# EAGLE board Kitty_PCB (EAGLE 9.2.2)
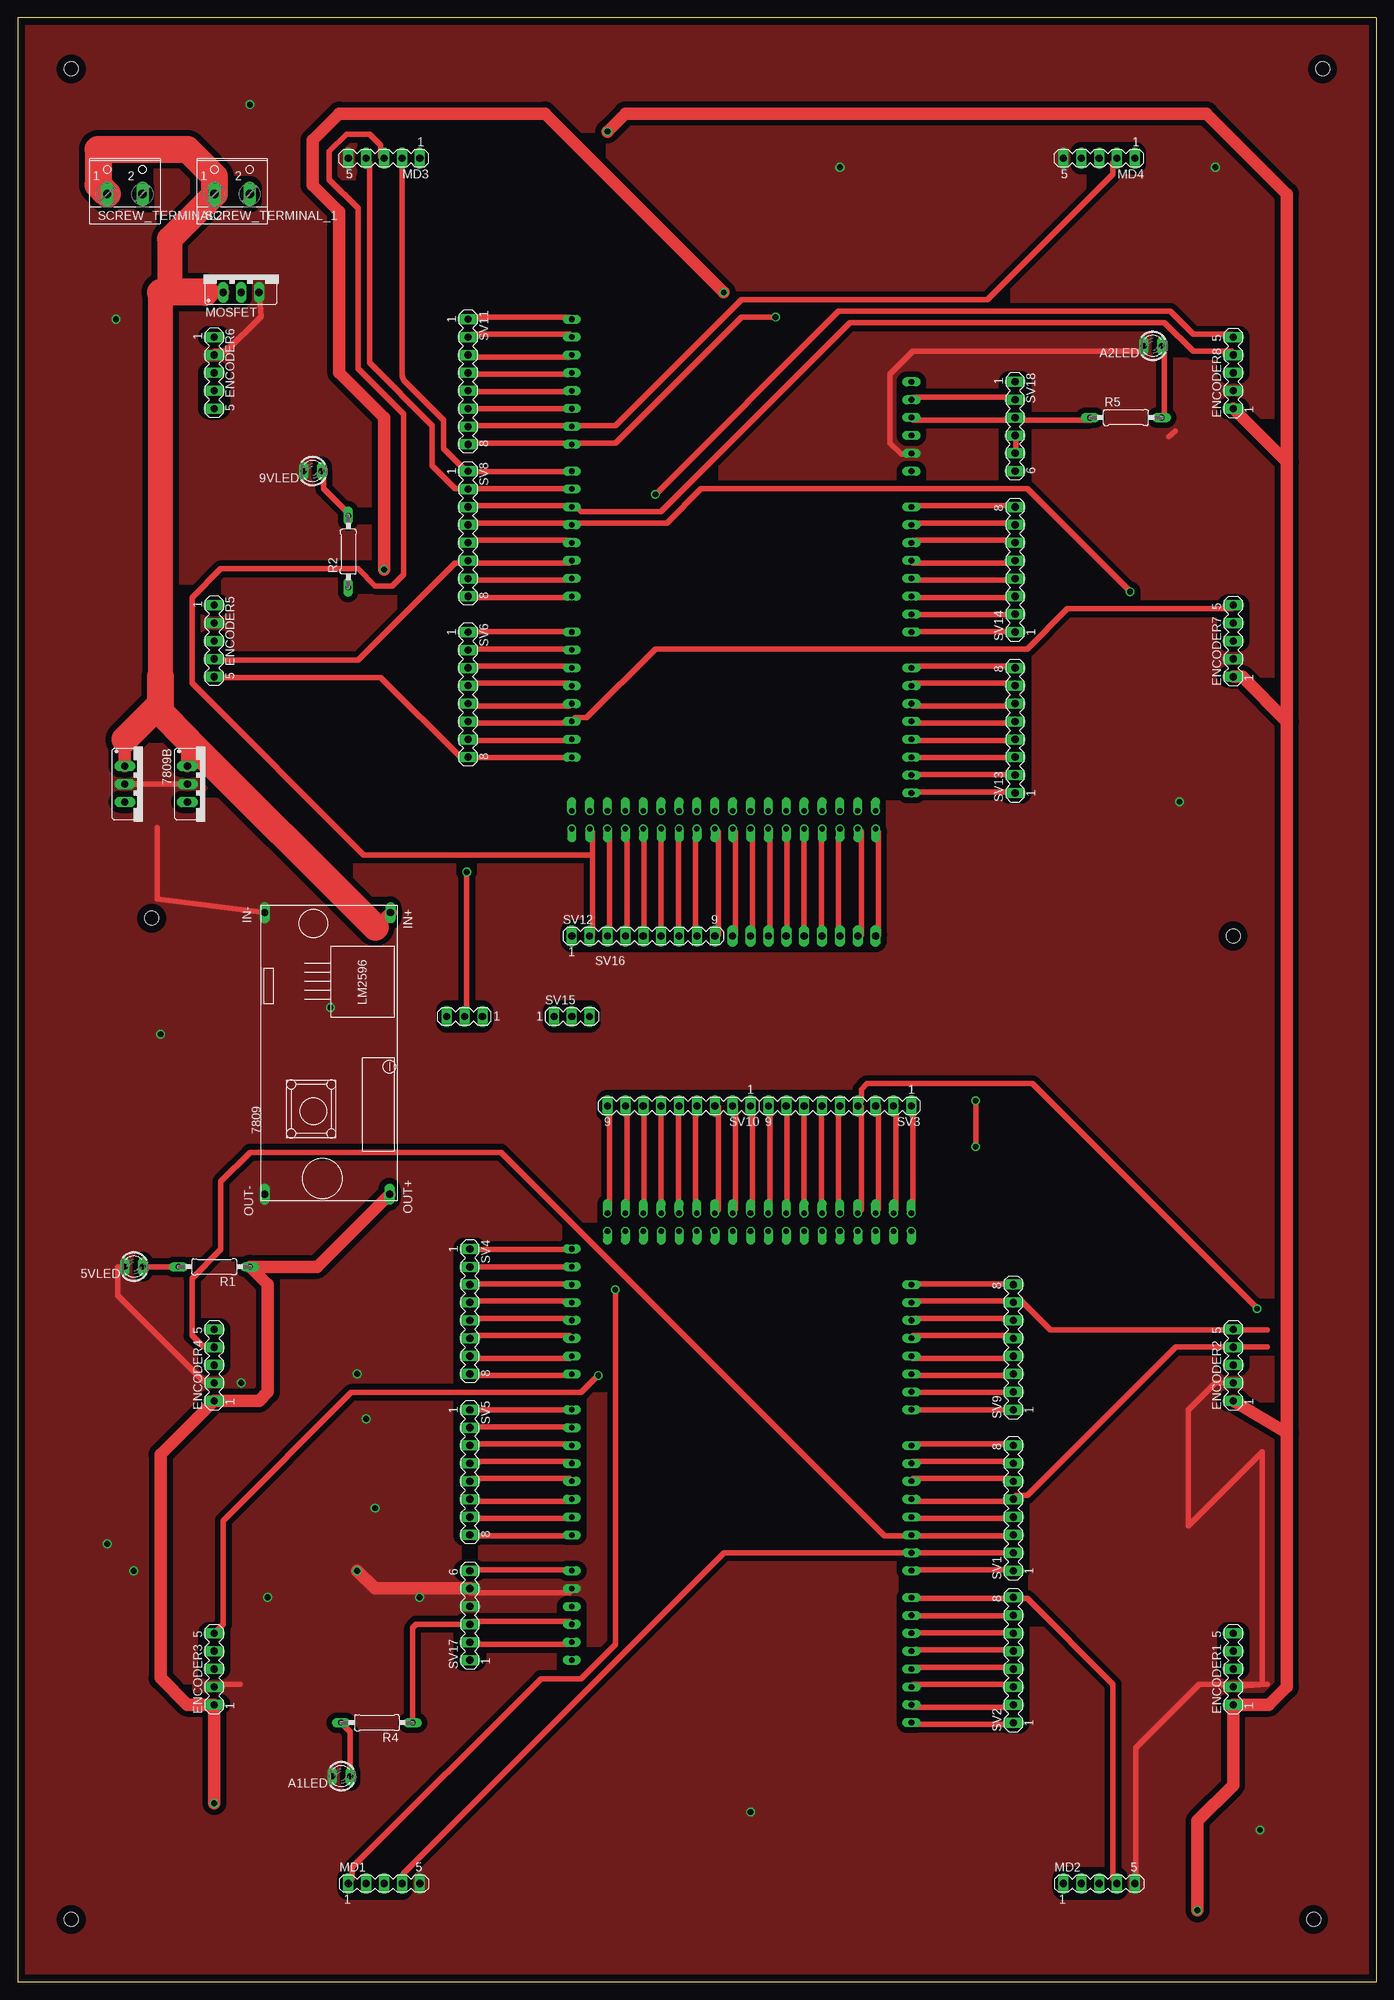
[diagram p0: board, top side]
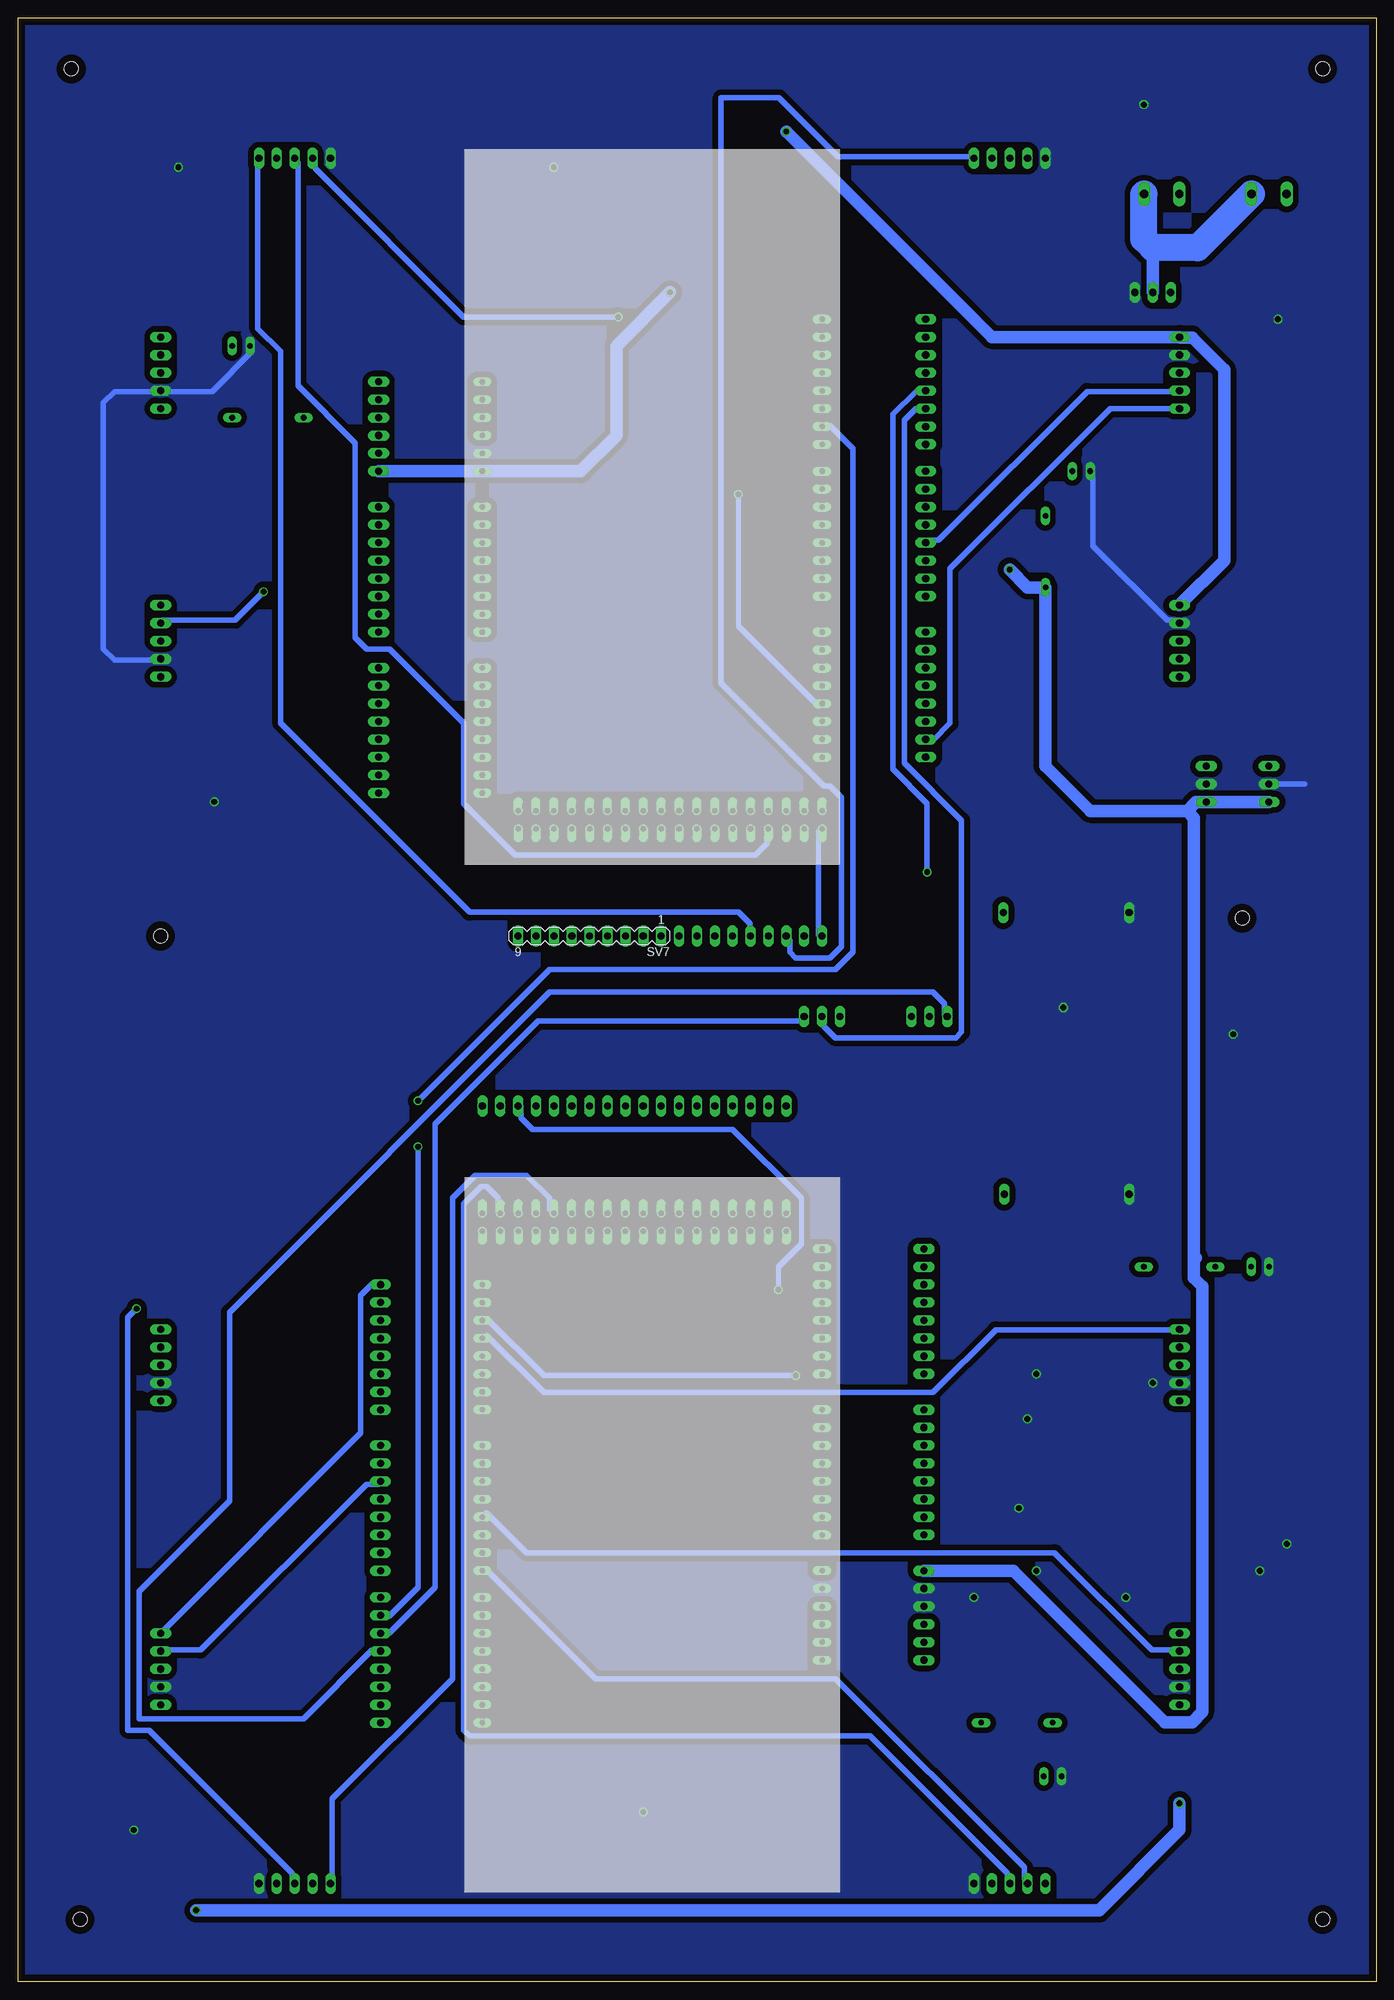
[diagram p1: board, bottom side, seen from below]

Size 193.04 x 279.07 mm. Coordinates in mm from the lower left corner, seen from the top.
Outline: 0,0 193.04,0 193.04,279.07 0,279.07 0,0
Copper layers (1*16): Top 0.035mm / dielectric 1.5mm / Bottom 0.035mm
Design rules "default *": minimum track width 10mil, minimum drill 24mil, track to track 16mil, track to pad 16mil, pad to pad 16mil, via to via 16mil, smd to smd 8mil, copper to edge 40mil, drill to drill 8mil, minimum pad ring 10mil, minimum via ring 8mil, stop-mask expansion 4mil, vias tented up to drill 0mil, thermal gap 10mil
Net classes: 0 default: width 0.813 mm, drill 0.813 mm, clearance 0.813 mm
Holes 2.03 mm at 184.15,8.89 7.62,8.89 7.62,271.78 19.05,151.13 172.72,148.59 185.42,271.78

## Footprints (pad centres in the part's own frame; a part is rotated, then mirrored left to right if it is on the bottom)
LED3MM = drill 0.813 long: A -1.27,0; K 1.27,0
78XXS = drill 1.016 long: GND 0,-2.54; IN -2.54,-2.54; OUT 2.54,-2.54
MEGABOX = drill 0.8 long: 0 12.7,24.13; 1 10.16,24.13; 2 7.62,24.13; 3 5.08,24.13; 3V3 -15.24,-24.13; 4 2.54,24.13; 5 0,24.13; 5V -12.7,-24.13; 6 -2.54,24.13; 7 -5.08,24.13; 8 -8.89,24.13; 9 -11.43,24.13; 10 -13.97,24.13; 11 -16.51,24.13; 12 -19.05,24.13; 13 -21.59,24.13; 14 17.78,24.13; 15 20.32,24.13; 16 22.86,24.13; 17 25.4,24.13; 18 27.94,24.13; 19 30.48,24.13; 20 33.02,24.13; 21 35.56,24.13; A0 0,-24.13; A1 2.54,-24.13; A2 5.08,-24.13; A3 7.62,-24.13; A4 10.16,-24.13; A5 12.7,-24.13; A6 15.24,-24.13; A7 17.78,-24.13; A8 22.86,-24.13; A9 25.4,-24.13; A10 27.94,-24.13; A11 30.48,-24.13; A12 33.02,-24.13; A13 35.56,-24.13; A14 38.1,-24.13; A15 40.64,-24.13; AREF -26.67,24.13; GND@1 -24.13,24.13; GND@2 -10.16,-24.13; GND@3 -7.62,-24.13; RESET -17.78,-24.13; VIN -5.08,-24.13 | drill 0.8 offset: 22 43.18,21.59; 23 45.72,21.59; 24 43.18,19.05; 25 45.72,19.05; 26 43.18,16.51; 27 45.72,16.51; 28 43.18,13.97; 29 45.72,13.97; 30 43.18,11.43; 31 45.72,11.43; 32 43.18,8.89; 33 45.72,8.89; 34 43.18,6.35; 35 45.72,6.35; 36 43.18,3.81; 37 45.72,3.81; 38 43.18,1.27; 39 45.72,1.27; 40 43.18,-1.27; 41 45.72,-1.27; 42 43.18,-3.81; 43 45.72,-3.81; 44 43.18,-6.35; 45 45.72,-6.35; 46 43.18,-8.89; 47 45.72,-8.89; 48 43.18,-11.43; 49 45.72,-11.43; 50 43.18,-13.97; 51 45.72,-13.97; 52 43.18,-16.51; 53 45.72,-16.51; GND@4 43.18,24.13; GND@5 45.72,24.13; GND@6 43.18,-19.05; GND@7 45.72,-19.05
MA05-1 = drill 1.016 long: 1 -5.08,0; 2 -2.54,0; 3 0,0; 4 2.54,0; 5 5.08,0
0207/10 = drill 0.813 long: 1 -5.08,0; 2 5.08,0
POWER_CONNECTOR = drill 1.194 long: 1 -2.5,-1.27; 2 2.5,-1.27
MA08-1 = drill 1.016 long: 1 -8.89,0; 2 -6.35,0; 3 -3.81,0; 4 -1.27,0; 5 1.27,0; 6 3.81,0; 7 6.35,0; 8 8.89,0
MA09-1 = drill 1.016 long: 1 -10.16,0; 2 -7.62,0; 3 -5.08,0; 4 -2.54,0; 5 0,0; 6 2.54,0; 7 5.08,0; 8 7.62,0; 9 10.16,0
MA03-1 = drill 1.016 long: 1 -2.54,0; 2 0,0; 3 2.54,0
MA06-1 = drill 1.016 long: 1 -6.35,0; 2 -3.81,0; 3 -1.27,0; 4 1.27,0; 5 3.81,0; 6 6.35,0
BUCK_CONVERTER = drill 1.016 long: IN+ -18.558,7.255; IN- -18.558,-10.618; OUT+ 21.442,7.128; OUT- 21.442,-10.618

## Placement (x,y rotation side)
5VLED  LED  [LED3MM]  16.51,101.6 180 top
9VLED  LED  [LED3MM]  41.91,214.63 180 top
7809  [78XXS]  17.78,170.18 270 top
7809B  [78XXS]  26.67,170.18 270 top
A1LED  LED  [LED3MM]  45.97,29.21 180 top
A2LED  LED  [LED3MM]  161.29,232.41 180 top
ARDUINO1  MEGA_DEVICE  [MEGABOX]  102.87,63.5 90 bottom
ARDUINO2  MEGA_DEVICE  [MEGABOX]  102.87,209.55 270 bottom
ENCODER1  [MA05-1]  172.72,44.45 90 top
ENCODER2  [MA05-1]  172.72,87.63 90 top
ENCODER3  [MA05-1]  27.94,44.45 90 top
ENCODER4  [MA05-1]  27.94,87.63 90 top
ENCODER5  [MA05-1]  27.94,190.5 270 top
ENCODER6  [MA05-1]  27.94,228.6 270 top
ENCODER7  [MA05-1]  172.72,190.5 90 top
ENCODER8  [MA05-1]  172.72,228.6 90 top
MD1  [MA05-1]  52.07,13.97 0 top
MD2  [MA05-1]  153.67,13.97 0 top
MD3  [MA05-1]  52.07,259.08 180 top
MD4  [MA05-1]  153.67,259.08 180 top
MOSFET  [78XXS]  31.75,242.57 0 top
R1  [0207/10]  27.94,101.6 180 top
R2  [0207/10]  46.99,203.2 90 top
R4  [0207/10]  51.05,36.83 180 top
R5  [0207/10]  157.48,222.25 0 top
SCREW_TERMINAL2  [POWER_CONNECTOR]  15.24,255.27 0 top
SCREW_TERMINAL_1  [POWER_CONNECTOR]  30.48,255.27 0 top
SV1  [MA08-1]  141.48,67.31 90 top
SV2  [MA08-1]  141.48,45.72 90 top
SV3  [MA09-1]  116.84,124.46 180 top
SV4  [MA08-1]  64.26,95.25 270 top
SV5  [MA08-1]  64.26,72.39 270 top
SV6  [MA08-1]  64.01,182.88 270 top
SV7  [MA09-1]  111.76,148.59 180 bottom
SV8  [MA08-1]  64.01,205.74 270 top
SV9  [MA08-1]  141.48,90.17 90 top
SV10  [MA09-1]  93.98,124.46 180 top
SV11  [MA08-1]  64.01,227.33 270 top
SV12  [MA09-1]  88.9,148.59 0 top
SV13  [MA08-1]  141.73,177.8 90 top
SV14  [MA08-1]  141.73,200.66 90 top
SV15  [MA03-1]  78.74,137.16 0 top
SV16  [MA03-1]  63.5,137.16 180 top
SV17  [MA06-1]  64.26,52.07 90 top
SV18  [MA06-1]  141.73,220.98 270 top
U$1  [BUCK_CONVERTER]  45.72,133.35 270 top

## Library data of the parts
5VLED 9VLED A1LED A2LED = robocon; MF: VISHAY SEMICONDUCTOR; OC_FARNELL: 1612437
7809 7809B MOSFET R1 R2 R4 R5 U$1 = robocon
ARDUINO1 ARDUINO2 = ArduinoMegaSymbol
ENCODER1-ENCODER8 MD1-MD4 SV1-SV18 = robocon; OC_FARNELL: unknown; OC_NEWARK: unknown
SCREW_TERMINAL2 SCREW_TERMINAL_1 = robocon; MPN: 237-102; OC_FARNELL: unknown; OC_NEWARK: 70K9898

## Nets
0A1: ARDUINO1.0 SV1.8
0A2: ARDUINO2.0 SV8.8
1A1: ARDUINO1.1 SV1.7
1A2: ARDUINO2.1 SV8.7
2A1: ARDUINO1.2 ENCODER1.4 SV1.6
2A2: ARDUINO2.2 ENCODER5.4 SV8.6
3A1: ARDUINO1.3 ENCODER2.4 SV1.5
3A2: ARDUINO2.3 ENCODER6.4 SV8.5
4A1: ARDUINO1.4 ENCODER3.4 SV1.4
4A2: ARDUINO2.4 ENCODER7.4 SV8.4
5A1: ARDUINO1.5 ENCODER4.4 SV1.3
5A2: ARDUINO2.5 ENCODER8.4 SV8.3
5V: ENCODER1.1 ENCODER2.1 ENCODER3.1 ENCODER4.1 ENCODER5.1 ENCODER6.1 ENCODER7.1 ENCODER8.1 R1.1 U$1.OUT+
6A1: ARDUINO1.6 MD1.4 SV1.2
6A2: ARDUINO2.6 MD3.4 SV8.2
7A1: ARDUINO1.7 MD1.2 SV1.1
7A2: ARDUINO2.7 MD3.2 SV8.1
8A1: ARDUINO1.8 MD2.4 SV2.8
8A2: ARDUINO2.8 MD4.4 SV11.8
9A1: MD2.2
9A2: ARDUINO1.9 ARDUINO2.9 MD4.2 SV2.7 SV11.7
9V: 7809.OUT 7809B.OUT ARDUINO1.VIN ARDUINO2.VIN R2.1 SV17.6 SV18.6
12A1: ARDUINO1.12 SV2.4
12A2: ARDUINO2.12 SV11.4
12V_IN_GND: MOSFET.GND SCREW_TERMINAL2.2 SCREW_TERMINAL_1.2
12V_OUT: 7809.IN 7809B.IN MOSFET.IN SCREW_TERMINAL2.1 SCREW_TERMINAL_1.1 U$1.IN+
13A1: ARDUINO1.13 SV2.3
13A2: ARDUINO2.13 SV11.3
14A1: ARDUINO1.14 SV9.1
14A2: ARDUINO2.14 SV6.1
15A1: ARDUINO1.15 SV9.2
15A2: ARDUINO2.15 SV6.2
16A1: ARDUINO1.16 SV9.3
16A2: ARDUINO2.16 SV6.3
17A1: ARDUINO1.17 SV9.4
17A2: ARDUINO2.17 SV6.4
18A1: ARDUINO1.18 ENCODER4.5 SV9.5
18A2: ARDUINO2.18 ENCODER8.5 SV6.5
19A1: ARDUINO1.19 ENCODER3.5 SV9.6
19A2: ARDUINO2.19 ENCODER7.5 SV6.6
20A1: ARDUINO1.20 ENCODER2.5 SV9.7
20A2: ARDUINO2.20 ENCODER6.5 SV6.7
21A1: ARDUINO1.21 ENCODER1.5 SV9.8
21A2: ARDUINO2.21 ENCODER5.5 SV6.8
23A1: ARDUINO1.23 MD1.3 SV3.2
23A2: ARDUINO2.23 MD3.3 SV12.2
25A1: ARDUINO1.25 MD1.1 SV3.3
25A2: ARDUINO2.25 MD3.1 SV12.3
27A1: ARDUINO1.27 MD2.3 SV3.4
27A2: ARDUINO2.27 MD4.3 SV12.4
29A1: ARDUINO1.29 MD2.1 SV3.5
29A2: ARDUINO2.29 MD4.1 SV12.5
31A1: ARDUINO1.31 SV3.6
31A2: ARDUINO2.31 SV12.6
33A1: ARDUINO1.33 SV3.7
33A2: ARDUINO2.33 SV12.7
35A1: ARDUINO1.35 SV3.8
35A2: ARDUINO2.35 SV12.8
37A1: ARDUINO1.37 SV3.9
37A2: ARDUINO2.37 SV12.9
A1SC1: ARDUINO1.10 SV2.6 SV15.3
A1SC2: ARDUINO1.11 SV2.5 SV16.3
A2SC1: ARDUINO2.10 SV11.6 SV15.2
A2SC2: ARDUINO2.11 SV11.5 SV16.2
GND: 5VLED.K 9VLED.K 7809.GND 7809B.GND A1LED.K A2LED.K ARDUINO1.GND@3 ARDUINO2.GND@3 ENCODER1.2 ENCODER2.2 ENCODER3.2 ENCODER4.2 ENCODER5.2 ENCODER6.2 ENCODER7.2 ENCODER8.2 MD1.5 MD2.5 MD3.5 MD4.5 MOSFET.OUT SV17.4 SV17.5 U$1.IN- U$1.OUT-
N$1: ARDUINO1.3V3 SV17.2
N$2: ARDUINO1.5V R4.1 SV17.3
N$3: 5VLED.A R1.2
N$4: SV18.4 SV18.5
N$5: ARDUINO2.3V3 SV18.2
N$6: ARDUINO2.5V R5.1 SV18.3
N$7: A1LED.A R4.2
N$8: A2LED.A R5.2
N$19: 9VLED.A R2.2
N$20: ARDUINO1.GND@5 SV3.1
N$24: ARDUINO1.GND@1 SV2.2
N$25: ARDUINO1.AREF SV2.1
N$26: ARDUINO1.A15 SV4.1
N$27: ARDUINO1.A14 SV4.2
N$28: ARDUINO1.A13 SV4.3
N$29: ARDUINO1.A12 SV4.4
N$30: ARDUINO1.A11 SV4.5
N$31: ARDUINO1.A10 SV4.6
N$32: ARDUINO1.A9 SV4.7
N$33: ARDUINO1.A8 SV4.8
N$34: ARDUINO1.A7 SV5.1
N$35: ARDUINO1.A6 SV5.2
N$36: ARDUINO1.A5 SV5.3
N$37: ARDUINO1.A4 SV5.4
N$38: ARDUINO1.A3 SV5.5
N$39: ARDUINO1.A2 SV5.6
N$40: ARDUINO1.A1 SV5.7
N$41: ARDUINO1.A0 SV5.8
N$59: SV15.1
N$64: ARDUINO2.GND@1 SV11.2
N$65: ARDUINO2.AREF SV11.1
N$66: ARDUINO2.A15 SV13.1
N$67: ARDUINO2.A14 SV13.2
N$68: ARDUINO2.A13 SV13.3
N$69: ARDUINO2.A12 SV13.4
N$70: ARDUINO2.A11 SV13.5
N$71: ARDUINO2.A10 SV13.6
N$72: ARDUINO2.A9 SV13.7
N$73: ARDUINO2.A8 SV13.8
N$74: ARDUINO2.A7 SV14.1
N$75: ARDUINO2.A6 SV14.2
N$76: ARDUINO2.A5 SV14.3
N$77: ARDUINO2.A4 SV14.4
N$78: ARDUINO2.A3 SV14.5
N$79: ARDUINO2.A2 SV14.6
N$80: ARDUINO2.A1 SV14.7
N$81: ARDUINO2.A0 SV14.8
N$82: SV16.1
N$88: ARDUINO1.39 SV10.1
N$89: ARDUINO1.41 SV10.2
N$90: ARDUINO1.43 SV10.3
N$91: ARDUINO1.45 SV10.4
N$92: ARDUINO1.47 SV10.5
N$93: ARDUINO1.49 SV10.6
N$94: ARDUINO1.51 SV10.7
N$95: ARDUINO1.53 SV10.8
N$96: ARDUINO1.GND@7 SV10.9
N$97: ARDUINO2.GND@5 SV12.1
N$106: ARDUINO2.39 SV7.1
N$107: ARDUINO2.41 SV7.2
N$108: ARDUINO2.43 SV7.3
N$109: ARDUINO2.45 SV7.4
N$110: ARDUINO2.47 SV7.5
N$111: ARDUINO2.49 SV7.6
N$112: ARDUINO2.51 SV7.7
N$113: ARDUINO2.53 SV7.8
N$114: ARDUINO2.GND@7 SV7.9
N$118: ENCODER1.3
N$122: ENCODER2.3
N$126: ENCODER4.3
N$130: ENCODER3.3

## Tracks (layer width: path | path; a pad name or v marks a point on that pad's centre or on a via)
0A1
  Top 0.813: ARDUINO1.0 127.2,76.4 141.02,76.4 SV1.8
0A2
  Top 0.813: ARDUINO2.0 78.44,196.7 64.62,196.7 SV8.8
1A1
  Top 0.813: ARDUINO1.1 127.2,73.97 141.02,73.97 SV1.7
1A2
  Top 0.813: ARDUINO2.1 78.44,199.14 64.62,199.14 SV8.7
2A1
  Top 0.813: ARDUINO1.2 127.2,71.53 141.02,71.53 SV1.6
  Bottom 0.813: ENCODER1.4 172.57,47.14 172.52,47.14 167.03,47.14 143.46,70.71 141.83,70.71 SV1.6
2A2
  Top 0.813: ARDUINO2.2 78.44,201.57 64.62,201.57 SV8.6 63.81,201.57 62.18,201.57 48.36,187.76 28.04,187.76 ENCODER5.4
3A1
  Top 0.813: ARDUINO1.3 127.2,68.28 141.02,68.28 SV1.5 141.83,69.09 143.46,69.09 164.59,90.22 177.6,90.22 ENCODER2.4
3A2
  Top 0.813: ARDUINO2.3 78.44,204.83 64.62,204.83 SV8.5
  Bottom 0.813: ENCODER6.4 28.04,225.96 41.05,225.96 62.18,204.83 63.81,204.83 SV8.5
4A1
  Top 0.813: ARDUINO1.4 127.2,65.84 141.02,65.84 SV1.4
  Bottom 0.813: ENCODER3.4 28.04,47.14 31.9,47.14 45.72,60.96 120.7,60.96 126.39,66.65 ARDUINO1.4
4A2  (via drill 0.81)
  Top 0.813: SV8.4 64.62,207.26 78.44,207.26 ARDUINO2.4 79.25,207.26 92.25,207.26 97.13,212.14 143.46,212.14 v158.09,197.51
  Bottom 0.813: v158.09,197.51 162.15,193.45 172.52,193.45 ENCODER7.4
5A1
  Top 0.813: SV1.3 141.02,63.4 127.2,63.4 ARDUINO1.5 126.39,63.4 123.14,63.4 68.68,117.86 33.02,117.86 28.85,113.69 28.85,104.04 24.79,99.97 24.79,91.85 26.42,90.22 27.23,90.22 ENCODER4.4
5A2
  Top 0.813: SV8.3 64.62,209.7 78.44,209.7 ARDUINO2.5 79.25,209.7 80.06,208.89 91.44,208.89 118.26,235.71 162.97,235.71 167.03,231.65 172.52,231.65 ENCODER8.4
5V  (via drill 0.81, 0.85)
  Top 1.778: U$1.OUT+ 42.54,101.6 R1.1 35.56,99.06 35.56,83.82 34.29,82.55 ENCODER4.1 20.32,74.93 20.32,43.18 24.13,39.37 ENCODER3.1 v27.94,25.4 | 180.34,77.98 180.34,41.91 177.8,39.37 ENCODER1.1 172.72,27.94 167.64,22.86 v167.64,10.16 | 180.34,77.98 ENCODER2.1 | 180.34,77.98 180.34,179.07 | 180.34,179.07 180.34,215.9 | 180.34,215.9 ENCODER8.1 | 180.34,215.9 180.34,254 168.91,265.43 86.36,265.43 v83.82,262.89 | ENCODER7.1 173.99,185.42 180.34,179.07
  Bottom 1.778: v167.64,10.16 39.37,10.16 27.94,21.59 v27.94,25.4 | v83.82,262.89 54.61,233.68 ENCODER6.1 27.86,233.6 26.16,233.6 21.59,229.04 21.59,201.93 ENCODER5.1
6A1
  Top 0.813: SV1.2 ARDUINO1.6 100.38,60.96 54.86,15.44 54.86,14.63 MD1.4
6A2
  Top 0.813: ARDUINO2.6 78.44,212.14 64.62,212.14 SV8.2 63.81,212.14 62.18,212.14 58.93,215.39 58.93,221.08 49.99,230.02 49.99,258.47 MD3.4
7A1
  Top 0.813: ARDUINO1.7 127.2,58.52 141.02,58.52 SV1.1
  Bottom 0.813: MD1.2 49.99,14.63 49.99,16.26 76.81,43.08 110.95,43.08 126.39,58.52 ARDUINO1.7
7A2
  Top 0.813: ARDUINO2.7 78.44,214.58 64.62,214.58 SV8.1 63.81,214.58 60.55,217.83 60.55,221.89 54.86,227.58 54.61,228.19 MD3.2
8A1
  Top 0.813: ARDUINO1.8 127.2,54.46 141.02,54.46 SV2.8 141.83,54.46 143.46,54.46 155.65,42.27 155.65,14.63 MD2.4
8A2  (via drill 0.81)
  Top 0.813: SV11.8 64.62,218.64 78.44,218.64 ARDUINO2.8 79.25,218.64 84.94,218.64 102.82,236.53 v107.7,236.53
  Bottom 0.813: v107.7,236.53 129.64,236.53 150.77,257.66 150.77,258.47 MD4.4
9A2  (via drill 0.81)
  Top 0.813: ARDUINO1.9 127.2,52.02 141.02,52.02 SV2.7 | SV11.7 64.62,221.08 78.44,221.08 ARDUINO2.9 79.25,221.08 84.94,221.08 102.82,238.96 137.77,238.96 155.65,256.85 155.65,258.47 MD4.2 | v136.14,125.17 v136.14,118.67
  Bottom 0.813: v136.14,118.67 136.14,56.08 140.21,52.02 141.02,52.02 SV2.7 | v136.14,125.17 117.45,143.87 76.81,143.87 74.37,146.3 74.37,217.83 77.62,221.08 78.44,221.08 ARDUINO2.9
9V  (via drill 0.81)
  Top 0.813: ARDUINO1.VIN 78.44,58.52 64.62,58.52 SV17.6
  Top 1.778: v52.07,200.66 52.07,222.25 45.72,228.6 45.72,251.46 41.91,255.27 41.91,261.62 45.72,265.43 74.93,265.43 v100.33,240.03
  Bottom 1.778: v52.07,200.66 49.53,198.12 R2.1 46.99,172.72 40.64,166.37 26.87,166.37 | v100.33,240.03 107.95,232.41 107.95,219.71 113.03,214.63 ARDUINO2.VIN SV18.6 | 26.87,166.37 25.6,167.64 7809B.OUT 7809.OUT | SV17.6 51.57,58.42 30.05,36.91 26.16,36.91 24.71,38.35 24.71,98.81 25.88,99.98 25.88,102.58 | 25.88,102.58 25.6,102.86 | 25.88,102.58 25.88,165.38 26.87,166.37
12A1
  Top 0.813: ARDUINO1.12 127.2,44.7 141.02,44.7 SV2.4
12A2
  Top 0.813: ARDUINO2.12 78.44,228.4 64.62,228.4 SV11.4
12V_IN_GND
  Bottom 1.778: 31.75,246.38 MOSFET.GND
  Bottom 3.835: SCREW_TERMINAL2.2 25.36,246.38 31.75,246.38 33.02,247.65 33.02,253.96 SCREW_TERMINAL_1.2
12V_OUT
  Top 0.813: U$1.IN+ 52.56,151.91
  Top 1.778: 7809.IN 15.24,176.53 | 24.13,176.53 7809B.IN | MOSFET.IN 26.67,240.03 | U$1.IN+ 50.93,149.86 50.8,149.86
  Top 3.556: SCREW_TERMINAL_1.1 21.59,247.61 21.59,240.03 | 20.32,185.42 20.32,240.03
  Top 3.81: 11.43,260.35 11.43,255.31 SCREW_TERMINAL2.1 | SCREW_TERMINAL_1.1 27.98,256.5 24.13,260.35 | 26.67,240.03 21.59,240.03 20.32,240.03 | 50.8,149.86 24.13,176.53 20.32,180.34 20.32,181.61 | 20.32,181.61 20.32,185.42 | 15.24,176.53 20.32,181.61
  Top 3.835: 11.43,260.35 24.13,260.35
13A1
  Top 0.813: ARDUINO1.13 127.2,42.27 141.02,42.27 SV2.3
13A2
  Top 0.813: ARDUINO2.13 78.44,230.84 64.62,230.84 SV11.3
14A1
  Top 0.813: SV9.1 ARDUINO1.14
14A2
  Top 0.813: ARDUINO2.14 78.44,191.82 64.62,191.82 SV6.1
15A1
  Top 0.813: ARDUINO1.15 127.2,83.72 141.02,83.72 SV9.2
15A2
  Top 0.813: ARDUINO2.15 78.44,189.38 64.62,189.38 SV6.2
16A1
  Top 0.813: ARDUINO1.16 127.2,86.16 141.02,86.16 SV9.3
16A2
  Top 0.813: ARDUINO2.16 78.44,186.94 64.62,186.94 SV6.3
17A1
  Top 0.813: ARDUINO1.17 127.2,88.6 141.02,88.6 SV9.4
17A2
  Top 0.813: ARDUINO2.17 78.44,184.51 64.62,184.51 SV6.4
18A1
  Top 0.813: ARDUINO1.18 127.2,91.85 141.02,91.85 SV9.5
  Bottom 0.813: ENCODER4.5 28.04,92.66 54.05,92.66 62.99,83.72 118.26,83.72 126.39,91.85 ARDUINO1.18
18A2  (via drill 0.81)
  Top 0.813: ARDUINO2.18 78.44,181.25 64.62,181.25 SV6.5 | v90.63,211.33 116.64,237.34 163.78,237.34 167.03,234.09 172.52,234.09 ENCODER8.5
  Bottom 0.813: v90.63,211.33 90.63,192.63 79.25,181.25 ARDUINO2.18
19A1  (via drill 0.81)
  Top 0.813: ARDUINO1.19 127.2,94.29 141.02,94.29 SV9.6 | ENCODER3.5 29.21,50.8 29.21,65.53 47.4,83.72 80.06,83.72 v82.5,86.16
  Bottom 0.813: v82.5,86.16 118.26,86.16 126.39,94.29 ARDUINO1.19
19A2
  Top 0.813: SV6.6 64.62,178.82 78.44,178.82 ARDUINO2.19 79.25,179.63 80.87,179.63 90.63,189.38 143.46,189.38 149.15,195.07 172.52,195.07 ENCODER7.5
20A1
  Top 0.813: ARDUINO1.20 127.2,96.72 141.02,96.72 SV9.7 141.83,96.72 142.65,96.72 146.71,92.66 177.6,92.66 177.56,92.62 172.76,92.67 ENCODER2.5
20A2
  Top 0.813: ARDUINO2.20 78.44,176.38 64.62,176.38 SV6.7
  Bottom 0.813: ENCODER6.5 37.8,223.52 60.55,200.76 60.55,178.82 62.99,176.38 63.81,176.38 SV6.7
21A1
  Top 0.813: ARDUINO1.21 127.2,99.16 141.02,99.16 SV9.8
  Bottom 0.813: ENCODER1.5 144.27,77.98 144.27,97.54 142.65,99.16 141.83,99.16 SV9.8
21A2
  Top 0.813: ARDUINO2.21 78.44,173.94 64.62,173.94 SV6.8 63.81,173.94 62.99,173.94 51.61,185.32 28.04,185.32 ENCODER5.5
23A1
  Top 0.813: ARDUINO1.23 124.77,109.73 124.77,124.36 SV3.2
  Bottom 0.813: MD1.3 52.43,14.63 52.43,15.44 71.93,34.95 128.83,34.95 129.64,35.76 129.64,110.54 127.2,112.98 126.39,112.98 124.77,111.35 124.77,109.73 ARDUINO1.23
23A2
  Top 0.813: 81.69,160.12 81.69,148.74 SV12.2 | 81.69,160.12 81.69,163.37 ARDUINO2.23 | 81.69,160.12 49.17,160.12 24.79,184.51 24.79,196.7 28.85,200.76 48.36,200.76 50.8,198.32 53.24,198.32 54.86,199.95 54.86,222.71 48.36,229.21 48.36,251.97 44.3,256.03 44.3,260.1 46.74,262.53 49.99,262.53 51.61,260.91 51.61,259.28 MD3.3
25A1  (via drill 0.81)
  Top 0.813: ARDUINO1.25 122.33,109.73 122.33,124.36 SV3.3 | v84.94,98.35 84.94,47.96 80.06,43.08 74.37,43.08 47.55,16.26 47.55,14.63 MD1.1
  Bottom 0.813: v84.94,98.35 84.94,101.6 81.69,104.85 81.69,111.35 91.44,121.11 119.89,121.11 121.51,122.73 121.51,124.36 SV3.3
25A2
  Top 0.813: ARDUINO2.25 84.12,163.37 84.12,148.74 SV12.3
  Bottom 0.813: MD3.1 57.3,259.28 76.45,259.28 84.84,267.67 93.07,267.67 93.07,184.51 78.44,169.88 77.62,169.88 76,168.25 76,147.12 77.62,145.49 82.5,145.49 83.31,146.3 83.31,147.93 SV12.3
27A1  (via drill 0.81)
  Top 0.813: ARDUINO1.27 119.89,109.73 119.89,124.36 SV3.4 119.89,125.17 119.89,126.8 120.7,127.61 144.17,127.61 v176.12,95.66
  Bottom 0.813: v176.12,95.66 177.39,94.39 177.39,35.76 174.35,35.76 154.03,15.44 154.03,14.63 MD2.3
27A2
  Top 0.813: ARDUINO2.27 86.56,163.37 86.56,148.74 SV12.4
  Bottom 0.813: MD4.3 153.21,258.47 153.21,226.77 145.09,218.64 145.09,191.01 143.46,189.38 140.21,189.38 129.64,178.82 129.64,167.44 122.33,160.12 88.19,160.12 86.56,161.75 86.56,163.37 ARDUINO2.27
29A1
  Top 0.813: ARDUINO1.29 116.64,109.73 116.64,124.36 SV3.5
  Bottom 0.813: MD2.1 148.34,14.63 148.34,26.01 131.27,43.08 131.27,111.35 128.02,114.61 120.7,114.61 117.45,111.35 117.45,109.73 ARDUINO1.29
29A2
  Top 0.813: ARDUINO2.29 89,163.37 89,148.74 SV12.5
  Bottom 0.813: MD4.1 158.9,258.47 158.9,234.9 155.65,231.65 155.65,178.82 128.83,151.99 90.63,151.99 89,150.37 89,148.74 SV12.5
31A1
  Top 0.813: ARDUINO1.31 114.2,109.73 114.2,124.36 SV3.6
31A2
  Top 0.813: SV12.6 ARDUINO2.31
33A1
  Top 0.813: SV3.7 ARDUINO1.33
33A2
  Top 0.813: ARDUINO2.33 93.88,163.37 93.88,148.74 SV12.7
35A1
  Top 0.813: ARDUINO1.35 109.32,109.73 109.32,124.36 SV3.8
35A2
  Top 0.813: ARDUINO2.35 96.32,163.37 96.32,148.74 SV12.8
37A1
  Top 0.813: ARDUINO1.37 106.88,109.73 106.88,124.36 SV3.9
37A2
  Top 0.813: ARDUINO2.37 99.57,163.37 99.57,148.74 SV12.9
A1SC1
  Top 0.813: ARDUINO1.10 127.2,49.58 141.02,49.58 SV2.6
  Bottom 0.813: SV15.3 81.69,136.55 119.08,136.55 133.71,121.92 133.71,56.08 140.21,49.58 141.02,49.58 SV2.6
A1SC2
  Top 0.813: ARDUINO1.11 127.2,47.14 141.02,47.14 SV2.5
  Bottom 0.813: SV16.3 61.37,137.36 61.37,138.99 62.99,140.61 117.45,140.61 162.92,95.15 162.92,68.33 175.77,55.47 175.77,37.39 152.4,37.39 142.65,47.14 141.83,47.14 SV2.5
A2SC1
  Top 0.813: SV11.6 ARDUINO2.10
  Bottom 0.813: SV11.6 65.43,223.52 67.06,221.89 67.06,173.13 58.93,165 58.93,134.93 59.74,134.11 76.81,134.11 78.44,135.74 78.44,136.55 SV15.2
A2SC2  (via drill 0.81)
  Top 0.813: ARDUINO2.11 78.44,225.96 64.62,225.96 SV11.5 | v63.81,157.68 63.81,137.36 SV16.2
  Bottom 0.813: v63.81,157.68 63.81,167.44 68.68,172.31 68.68,222.71 65.43,225.96 64.62,225.96 SV11.5
GND  (via drill 0.81, 0.85)
  Top 0.813: 24.55,170.18 7809B.GND 7809.GND | 64.26,55.27 78.44,55.27 ARDUINO1.GND@3 | ARDUINO2.GND@3 126.39,217.02 125.58,217.02 123.95,218.64 123.95,228.4 127.2,231.65 159.72,231.65 A2LED.K | ENCODER3.2 28.04,42.27 31.65,42.27 | 176.89,42.27 167.89,42.27 158.9,33.27 158.9,14.63 MD2.5 | 176.89,42.27 177.6,42.27 ENCODER1.2 | ENCODER4.2 27.23,85.34 26.42,85.34 14.22,97.54 14.22,101.6 5VLED.K | ENCODER2.2 170.18,85.09 166.37,81.28 166.37,64.77 176.89,75.29 176.89,42.27 | ENCODER6.2 28.04,231.65 29.67,231.65 34.6,236.58 MOSFET.OUT | 19.86,163.98 19.86,153.84 U$1.IN- | 164.47,220.35 163.58,219.51
  Top 1.778: SV17.5 50.8,55.88 v48.26,58.42
  Bottom 0.813: ENCODER7.2 173.33,187.76 179.22,187.76 180.85,189.38 180.85,224.33 179.22,225.96 173.33,225.96 ENCODER8.2 172.52,225.96 165.41,225.96 159.72,231.65 A2LED.K | ENCODER5.2 28.04,193.45 29.67,193.45 40.23,204.01 40.23,214.58 9VLED.K | 64.26,53.65 | 64.26,53.65 SV17.4 | 7809.GND 10.16,170.18
  other vias: 31.75,85.09 49.53,80.01 48.26,86.36 16.51,58.42 12.7,62.23 35.56,54.61 57.15,54.61 50.8,67.31 104.14,24.13 176.53,21.59 165.1,167.64 44.45,138.43 20.32,134.62 13.97,236.22 33.02,266.7 170.18,257.81 116.84,257.81
  pour Bottom: -21.59,287.02 -21.59,-3.81 -8.89,-16.51 207.01,-16.51 207.01,297.18 -12.7,297.18 -12.7,295.91
  pour Top: -21.59,299.72 -21.59,-6.35 -11.43,-16.51 189.23,-16.51 207.01,1.27 207.01,284.48 191.77,299.72
N$1
  Top 0.813: ARDUINO1.3V3 78.44,47.96 64.62,47.96 SV17.2
N$2
  Top 0.813: ARDUINO1.5V 78.44,51.21 64.62,51.21 SV17.3 56.64,50.8 56.13,50.29 R4.1
N$3
  Top 0.813: R1.2 5VLED.A
N$4
  Top 0.813: SV18.5 141.83,217.83 141.83,219.46 SV18.4
N$5
  Top 0.813: ARDUINO2.3V3 127.2,225.15 141.02,225.15 SV18.2
N$6
  Top 0.813: ARDUINO2.5V 127.2,221.89 141.02,221.89 SV18.3 141.83,221.89 152.4,221.89 R5.1
N$7
  Top 0.813: R4.2 47.24,35.56 A1LED.A
N$8
  Top 0.813: R5.2 162.97,222.71 162.97,231.65 A2LED.A
N$19
  Top 0.813: 9VLED.A 43.48,214.58 43.48,212.14 46.74,208.89 R2.2
N$20
  Top 0.813: ARDUINO1.GND@5 127.2,109.73 127.2,124.36 SV3.1
N$24
  Top 0.813: ARDUINO1.GND@1 127.2,39.01 141.02,39.01 SV2.2
N$25
  Top 0.813: ARDUINO1.AREF 127.2,36.58 141.02,36.58 SV2.1
N$26
  Top 0.813: ARDUINO1.A15 78.44,104.04 64.62,104.04 SV4.1
N$27
  Top 0.813: SV4.2 ARDUINO1.A14
N$28
  Top 0.813: ARDUINO1.A13 78.44,99.16 64.62,99.16 SV4.3
N$29
  Top 0.813: ARDUINO1.A12 78.44,96.72 64.62,96.72 SV4.4
N$30
  Top 0.813: ARDUINO1.A11 78.44,94.29 64.62,94.29 SV4.5
N$31
  Top 0.813: ARDUINO1.A10 78.44,91.85 64.62,91.85 SV4.6
N$32
  Top 0.813: ARDUINO1.A9 78.44,88.6 64.62,88.6 SV4.7
N$33
  Top 0.813: ARDUINO1.A8 78.44,86.16 64.62,86.16 SV4.8
N$34
  Top 0.813: SV5.1 ARDUINO1.A7
N$35
  Top 0.813: ARDUINO1.A6 78.44,78.84 64.62,78.84 SV5.2
N$36
  Top 0.813: ARDUINO1.A5 78.44,76.4 64.62,76.4 SV5.3
N$37
  Top 0.813: ARDUINO1.A4 78.44,73.97 64.62,73.97 SV5.4
N$38
  Top 0.813: ARDUINO1.A3 78.44,71.53 64.62,71.53 SV5.5
N$39
  Top 0.813: ARDUINO1.A2 78.44,68.28 64.62,68.28 SV5.6
N$40
  Top 0.813: ARDUINO1.A1 78.44,65.84 64.62,65.84 SV5.7
N$41
  Top 0.813: ARDUINO1.A0 78.44,63.4 64.62,63.4 SV5.8
N$64
  Top 0.813: ARDUINO2.GND@1 78.44,234.09 64.62,234.09 SV11.2
N$65
  Top 0.813: ARDUINO2.AREF 78.44,236.53 64.62,236.53 SV11.1
N$66
  Top 0.813: ARDUINO2.A15 127.2,169.06 141.02,169.06 SV13.1
N$67
  Top 0.813: ARDUINO2.A14 127.2,171.5 141.02,171.5 SV13.2
N$68
  Top 0.813: ARDUINO2.A13 127.2,173.94 141.02,173.94 SV13.3
N$69
  Top 0.813: ARDUINO2.A12 127.2,176.38 141.02,176.38 SV13.4
N$70
  Top 0.813: ARDUINO2.A11 127.2,178.82 141.02,178.82 SV13.5
N$71
  Top 0.813: ARDUINO2.A10 127.2,181.25 141.02,181.25 SV13.6
N$72
  Top 0.813: ARDUINO2.A9 127.2,184.51 141.02,184.51 SV13.7
N$73
  Top 0.813: ARDUINO2.A8 127.2,186.94 141.02,186.94 SV13.8
N$74
  Top 0.813: ARDUINO2.A7 127.2,191.82 141.02,191.82 SV14.1
N$75
  Top 0.813: ARDUINO2.A6 127.2,194.26 141.02,194.26 SV14.2
N$76
  Top 0.813: ARDUINO2.A5 127.2,196.7 141.02,196.7 SV14.3
N$77
  Top 0.813: ARDUINO2.A4 127.2,199.14 141.02,199.14 SV14.4
N$78
  Top 0.813: ARDUINO2.A3 127.2,201.57 141.02,201.57 SV14.5
N$79
  Top 0.813: ARDUINO2.A2 127.2,204.83 141.02,204.83 SV14.6
N$80
  Top 0.813: ARDUINO2.A1 127.2,207.26 141.02,207.26 SV14.7
N$81
  Top 0.813: ARDUINO2.A0 127.2,209.7 141.02,209.7 SV14.8
N$88
  Top 0.813: ARDUINO1.39 104.45,109.73 104.45,124.36 SV10.1
N$89
  Top 0.813: ARDUINO1.41 102.01,109.73 102.01,124.36 SV10.2
N$90
  Top 0.813: ARDUINO1.43 99.57,109.73 99.57,124.36 SV10.3
N$91
  Top 0.813: ARDUINO1.45 96.32,109.73 96.32,124.36 SV10.4
N$92
  Top 0.813: ARDUINO1.47 93.88,109.73 93.88,124.36 SV10.5
N$93
  Top 0.813: SV10.6 ARDUINO1.49
N$94
  Top 0.813: ARDUINO1.51 89,109.73 89,124.36 SV10.7
N$95
  Top 0.813: ARDUINO1.53 86.56,109.73 86.56,124.36 SV10.8
N$96
  Top 0.813: ARDUINO1.GND@7 84.12,109.73 84.12,124.36 SV10.9
N$97
  Bottom 0.813: ARDUINO2.GND@5 79.25,163.37 79.25,148.74 SV12.1
N$106
  Top 0.813: ARDUINO2.39 102.01,163.37 102.01,148.74 SV7.1
N$107
  Top 0.813: ARDUINO2.41 104.45,163.37 104.45,148.74 SV7.2
N$108
  Top 0.813: ARDUINO2.43 106.88,163.37 106.88,148.74 SV7.3
N$109
  Top 0.813: ARDUINO2.45 109.32,163.37 109.32,148.74 SV7.4
N$110
  Top 0.813: SV7.5 ARDUINO2.47
N$111
  Top 0.813: ARDUINO2.49 114.2,163.37 114.2,148.74 SV7.6
N$112
  Top 0.813: ARDUINO2.51 116.64,163.37 116.64,148.74 SV7.7
N$113
  Top 0.813: ARDUINO2.53 119.89,163.37 119.89,148.74 SV7.8
N$114
  Top 0.813: ARDUINO2.GND@7 122.33,163.37 122.33,148.74 SV7.9

## Text on the board
tTest: E6 | 9V | KITTY1.0 | MaRS IITR